# Altium PCB altium.pcbdoc
Units mil, origin at the board's own origin, x right, y up, seen from the top; angles counter-clockwise.
Board outline 2480.77 x 3650 mil, 2 copper layers (Top Layer, Bottom Layer); 6 components, 41 nets, 53 pads, 0 vias.
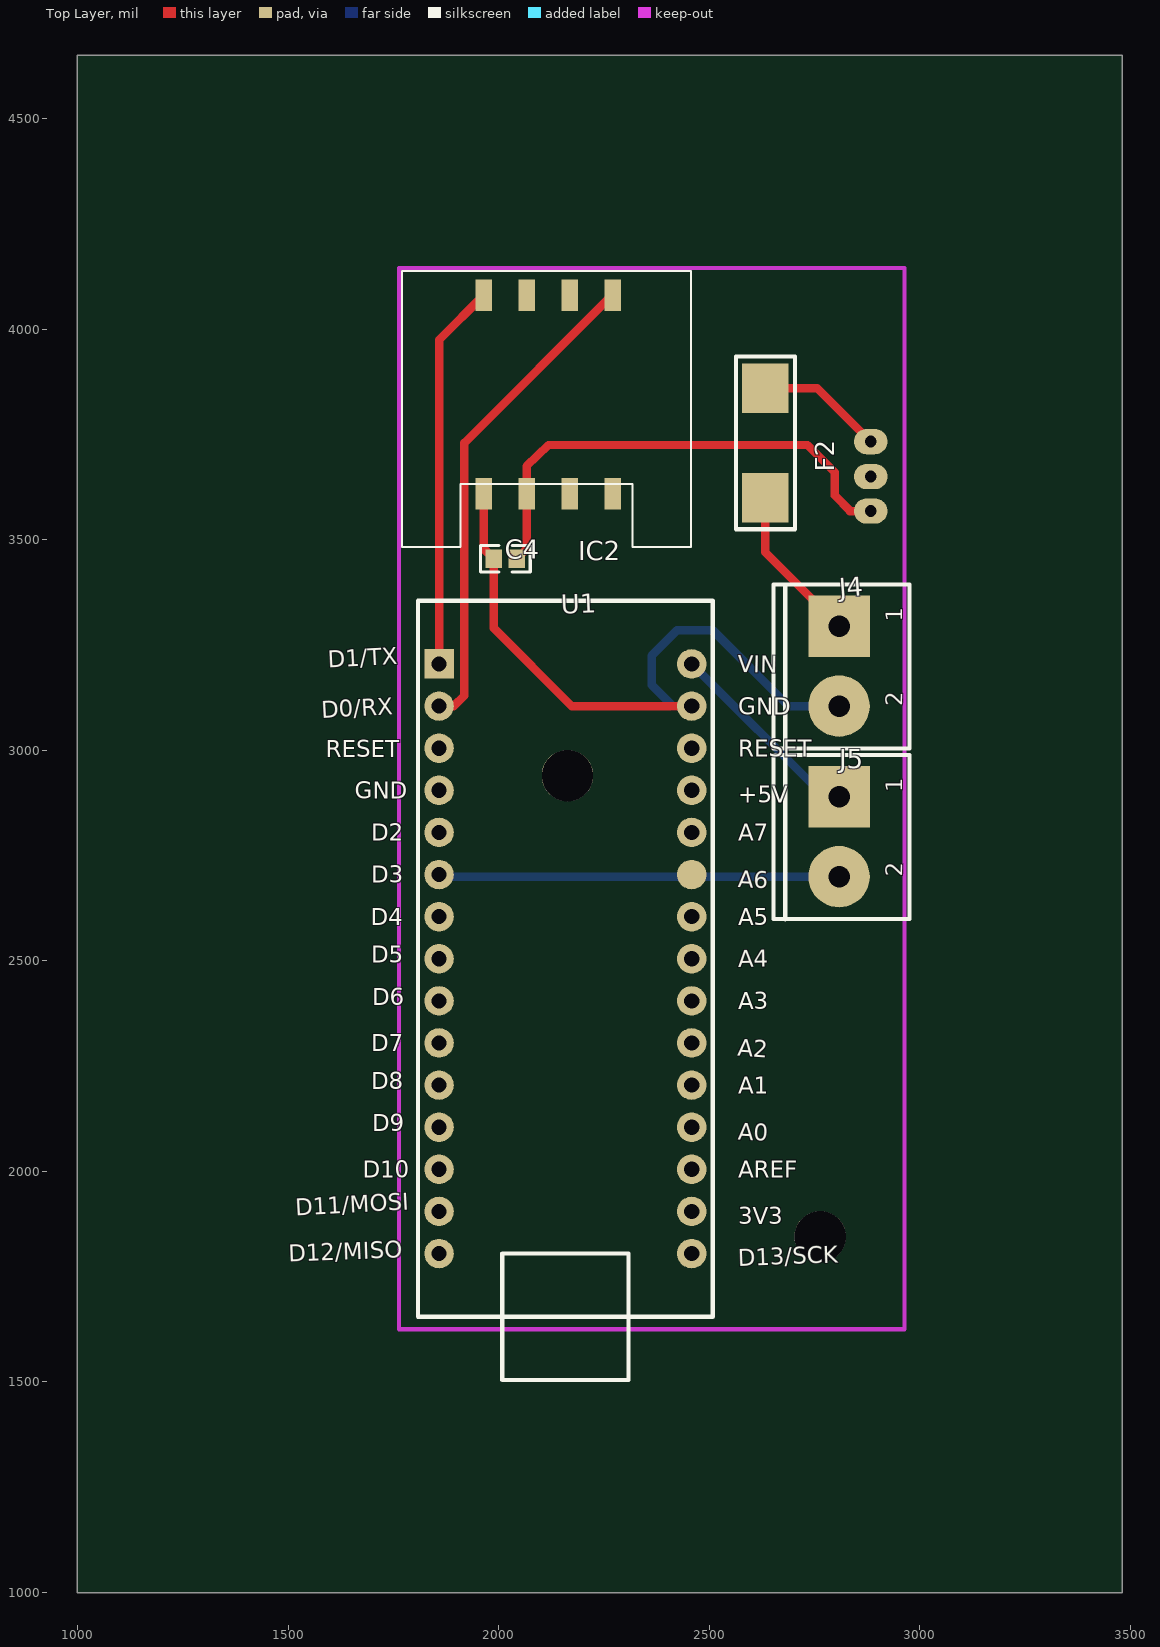
[diagram p0: Top Layer view]
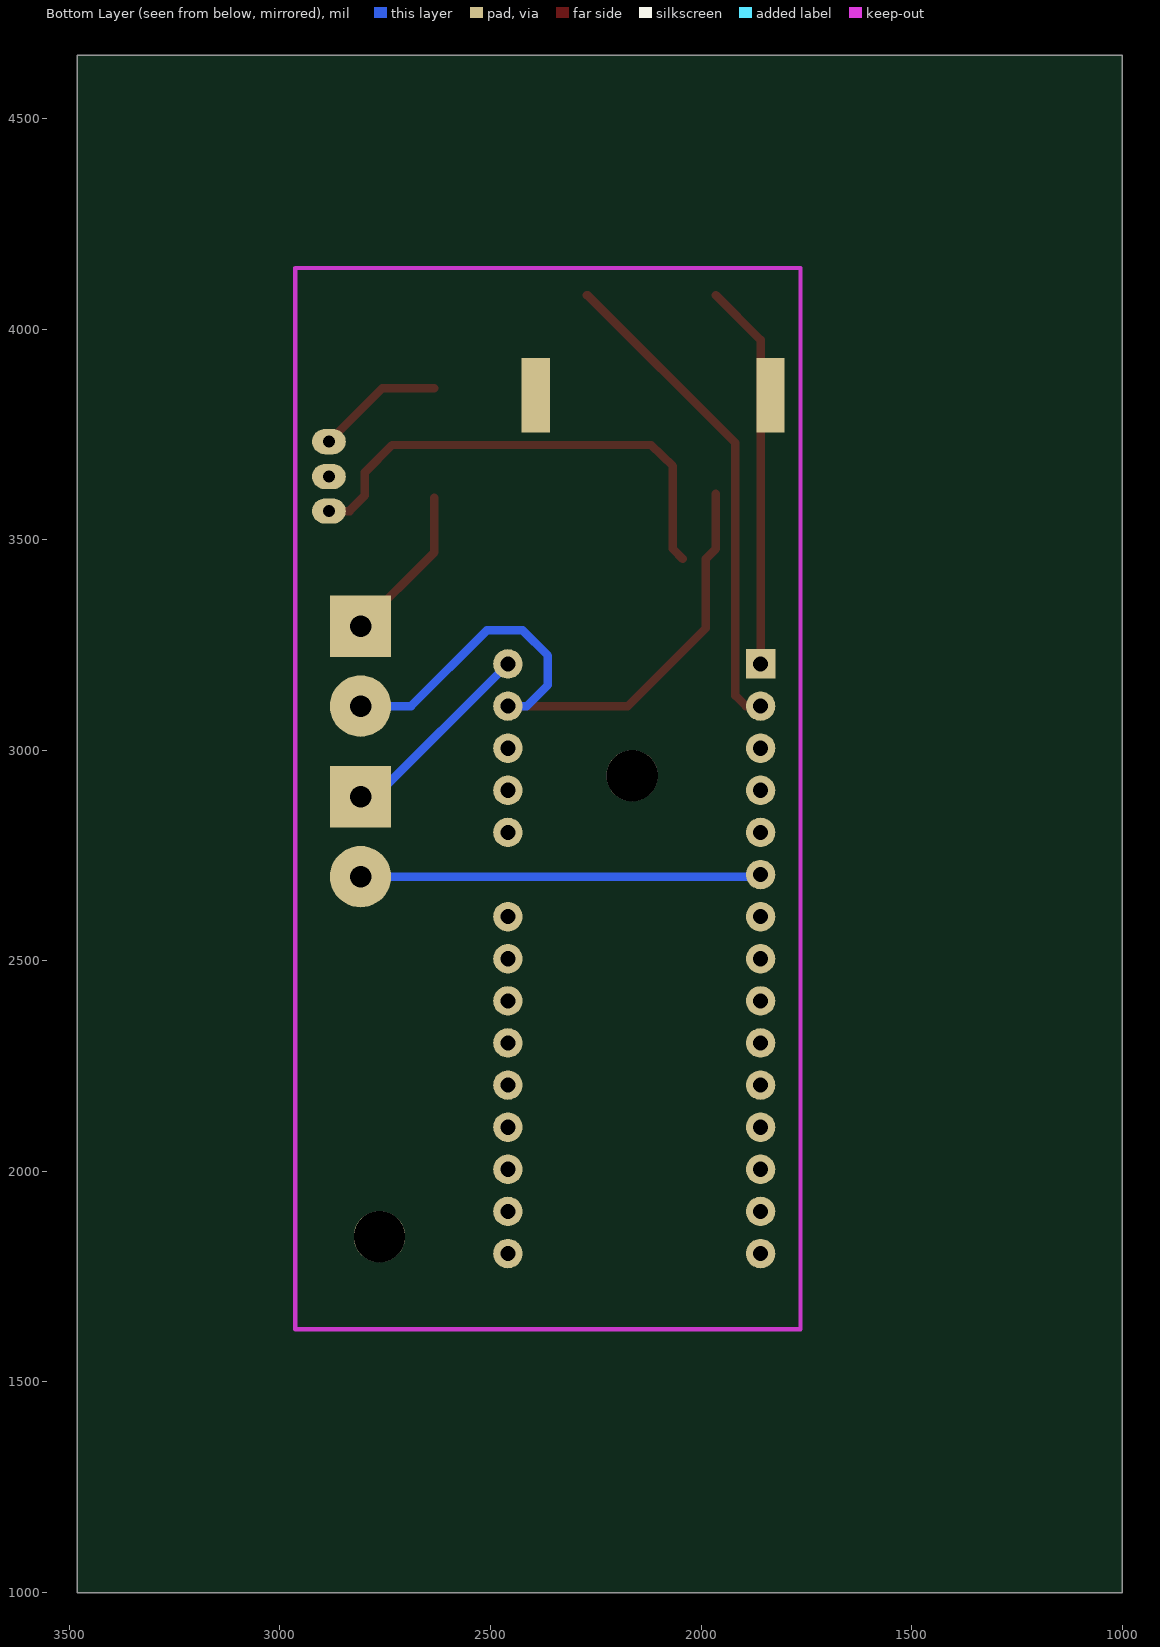
[diagram p1: Bottom Layer view, seen from below]

## Layer stack, top to bottom
Top Layer: signal copper (thickness not stored)
Dielectric: dielectric 12.6, FR-4, Dk 4.8
Bottom Layer: signal copper (thickness not stored)

## Board outline
3480.77,1000 1000,1000 1000,4650 3480.77,4650

## Components (designator, comment, footprint, x,y, rotation, side; value= is the part's Value field where it differs from the comment)
C4 "10nF" 0603 2016.04,3455 r0 top
F2 "NO" OMF_125 2618.6,3700 r270 top
IC2 "TR-72D" IQRF_KON-SIM-01 2113.6,3885 r180 top
J4 "KF127_2P_5.08" KF127_2P_5.08 2798.6,3205 r0 top
J5 "KF127_2P_5.08" KF127_2P_5.08 2798.6,2800 r0 top
U1 "ARDUINO_NANO" ARDUINO_NANO 2158.6,2505 r0 top

## Footprints (in the part's own frame and the unit in brackets; to place one, negate y for a bottom-side part, rotate by r counter-clockwise, add the part's x,y. Pads: shape width x height; smd on the part's side, far side on the other; paste and mask are expansions set on the pad)
0603 [mm]
  rect 1x1.1 smd: 1(-0.7,0) 2(0.7,0)
  silkscreen extent -1.5,-0.8 1.5,0.8
ARDUINO_NANO [mil]
  rect 70x70 hole 36: 1(-300,700)
  round 70 hole 36: 2(-300,600) 3(-300,500) 4(-300,400) 5(-300,300) 6(-300,200) 7(-300,100) 8(-300,0) 9(-300,-100) 10(-300,-200) 11(-300,-300) 12(-300,-400) 13(-300,-500) 14(-300,-600) 15(-300,-700) 16(300,-700) 17(300,-600) 18(300,-500) 19(300,-400) 20(300,-300) 21(300,-200) 22(300,-100) 23(300,0) 24(300,100) 26(300,300) 27(300,400) 28(300,500) 29(300,600) 30(300,700)
  round 70 smd: 25(300,200)
  silkscreen extent -350,-1000 350,850
IQRF_KON-SIM-01 [mm]
  rect 1x1.9 smd: 1(-4.002,7.002) 2(-1.401,7.002) 3(1.19,7.002) 4(3.781,7.002) 5(-4.002,-4.969) 6(-1.401,-4.969) 7(1.19,-4.969) 8(3.781,-4.969)
  rect 1.7x4.5 smd far side: 9(-7.08,1.07) 9(7.079,1.07)
  silkscreen extent -8.72,-6.43 8.72,10.22
KF127_2P_5.08 [mm]
  rect 3.7x3.7 hole 1.3: 1(0.254,2.286)
  round 3.7 hole 1.3: 2(0.254,-2.54)
  silkscreen extent -3.7,-5.11 4.5,4.8
OMF_125 [mm]
  rect 3x2.8 smd: 1(-4.064,0.381) 2(2.54,0.381)
  silkscreen extent -5.97,-1.4 4.44,2.16

## Free pads (board coordinates)
  oval 80x60 hole 28: 3(2883.6,3568) 3(2883.6,3650) 3(2883.6,3733)
  round 122 hole 122 unplated: ""(2163.6,2940) ""(2763.6,1845)

## Nets (pads, with @x,y where several pads share a name; then routed paths per layer and width w, separated by ;. In a path a pad name is that pad's centre, name@x,y a point inside that pad or via, vN(x,y) a via of type N, cw(c..) or ccw(c..) an arc to the next point about the centre after c; other vN are vias at no path point)
0: pad.3@2883.6,3650
5V+: C4.2 IC2.3 pad.3@2883.6,3568 | length 1165
  Top Layer w20: C4.2 2066.74,3478.14 IC2.3 2066.74,3675 2118.6,3725 2733.6,3725 2798.6,3660 2798.6,3605 2833.6,3570 2833.6,3568 pad.3@2883.6,3568
5V-: F2.1 pad.3@2883.6,3733 | length 302.6
  Top Layer w20: F2.1 2756.6,3860 pad.3@2883.6,3733
+12V: J5.1 U1.30 | length 480.5
  Bottom Layer w20: U1.30 2773.6,2890 J5.1
F2_2: F2.2 J4.1 | length 377.5
  Top Layer w20: F2.2 2633.6,3470 J4.1
GND: C4.1 IC2.4 J4.2 U1.29 | length 1606
  Top Layer w20: IC2.4 1964.74,3478.74 C4.1 1988.48,3290.12 2173.6,3105 U1.29
  Bottom Layer w20: U1.29 2413.6,3105 2363.6,3155 2363.6,3225 2423.6,3285 2508.6,3285 2688.6,3105 J4.2
IC2_1: IC2.1
IC2_2: IC2.2
IC2_6: IC2.6
IC2_7: IC2.7
RX: IC2.5 U1.2 | length 1168.1
  Top Layer w20: U1.2 1893.6,3105 1918.6,3130 1918.6,3730 2269.23,4080.63 IC2.5
S$22: 
S$67: 
S$69: 
SIG: J5.2 U1.6 | length 952.1
  Bottom Layer w20: U1.6 1863.6,2700 J5.2
TX: IC2.8 U1.1 | length 919.6
  Top Layer w20: U1.1 1858.6,3974.49 IC2.8
U1_3: U1.3
U1_4: U1.4
U1_5: U1.5
U1_7: U1.7
U1_8: U1.8
U1_9: U1.9
U1_10: U1.10
U1_11: U1.11
U1_12: U1.12
U1_13: U1.13
U1_14: U1.14
U1_15: U1.15
U1_16: U1.16
U1_17: U1.17
U1_18: U1.18
U1_19: U1.19
U1_20: U1.20
U1_21: U1.21
U1_22: U1.22
U1_23: U1.23
U1_24: U1.24
U1_25: U1.25
U1_26: U1.26
U1_27: U1.27
U1_28: U1.28
pads on no net: IC2.9

## Text inside footprints (layer, text, board x,y; h text height)
J4: Top Overlay "1" at 2958.28,3305 h39.37 r90; Top Overlay "2" at 2958.28,3104.66 h39.37 r89
J5: Top Overlay "1" at 2958.28,2900 h39.37 r90; Top Overlay "2" at 2958.28,2699.66 h39.37 r89
U1: Top Overlay "D1/TX" at 1595.94,3195.93 h40 r3; Top Overlay "GND" at 2568.6,3085 h40; Top Overlay "+5V" at 2568.6,2875 h40; Top Overlay "D12/MISO" at 1501.4,1785.01 h40 r2; Top Overlay "VIN" at 2568.25,3185 h40 r359; Top Overlay "D13/SCK" at 2569.3,1775.01 h40 r2; Top Overlay "GND" at 1658.9,2885 h40; Top Overlay "D0/RX" at 1579.64,3075.93 h40 r3; Top Overlay "RESET" at 1589.5,2983.2 h40; Top Overlay "D2" at 1698.2,2785 h40; Top Overlay "D3" at 1698.2,2685 h40; Top Overlay "D4" at 1696.4,2585 h40; Top Overlay "D5" at 1698.2,2495 h40; Top Overlay "D6" at 1700,2395 h40; Top Overlay "D7" at 1698.2,2285 h40; Top Overlay "D8" at 1698.2,2195 h40; Top Overlay "D9" at 1700,2095 h40; Top Overlay "D10" at 1677.1,1985 h40; Top Overlay "D11/MOSI" at 1518.14,1895.03 h40 r3; Top Overlay "3V3" at 2568.6,1875 h40; Top Overlay "AREF" at 2568.6,1985 h40; Top Overlay "A0" at 2567.55,2075.03 h40 r357; Top Overlay "A1" at 2568.6,2185 h40; Top Overlay "A2" at 2567.2,2275.05 h40 r356; Top Overlay "A3" at 2568.6,2385 h40; Top Overlay "A4" at 2568.95,2485 h40 r1; Top Overlay "A5" at 2568.6,2585 h40; Top Overlay "A6" at 2567.55,2675.03 h40 r357; Top Overlay "A7" at 2568.6,2785 h40; Top Overlay "RESET" at 2568.6,2985 h40